# Altium PCB Main.PcbDoc (part 2 of 2)
Units mil, origin at the board's own origin, x right, y up, seen from the top; angles counter-clockwise.
Board outline 5500 x 5000 mil, 4 copper layers (Top Layer, Gnd 1, Interconnects, Gnd 2), stack 65.2 mil thick; 168 components, 137 nets, 565 pads, 1221 vias.
Unrouted connection lines stored in the file: 808.
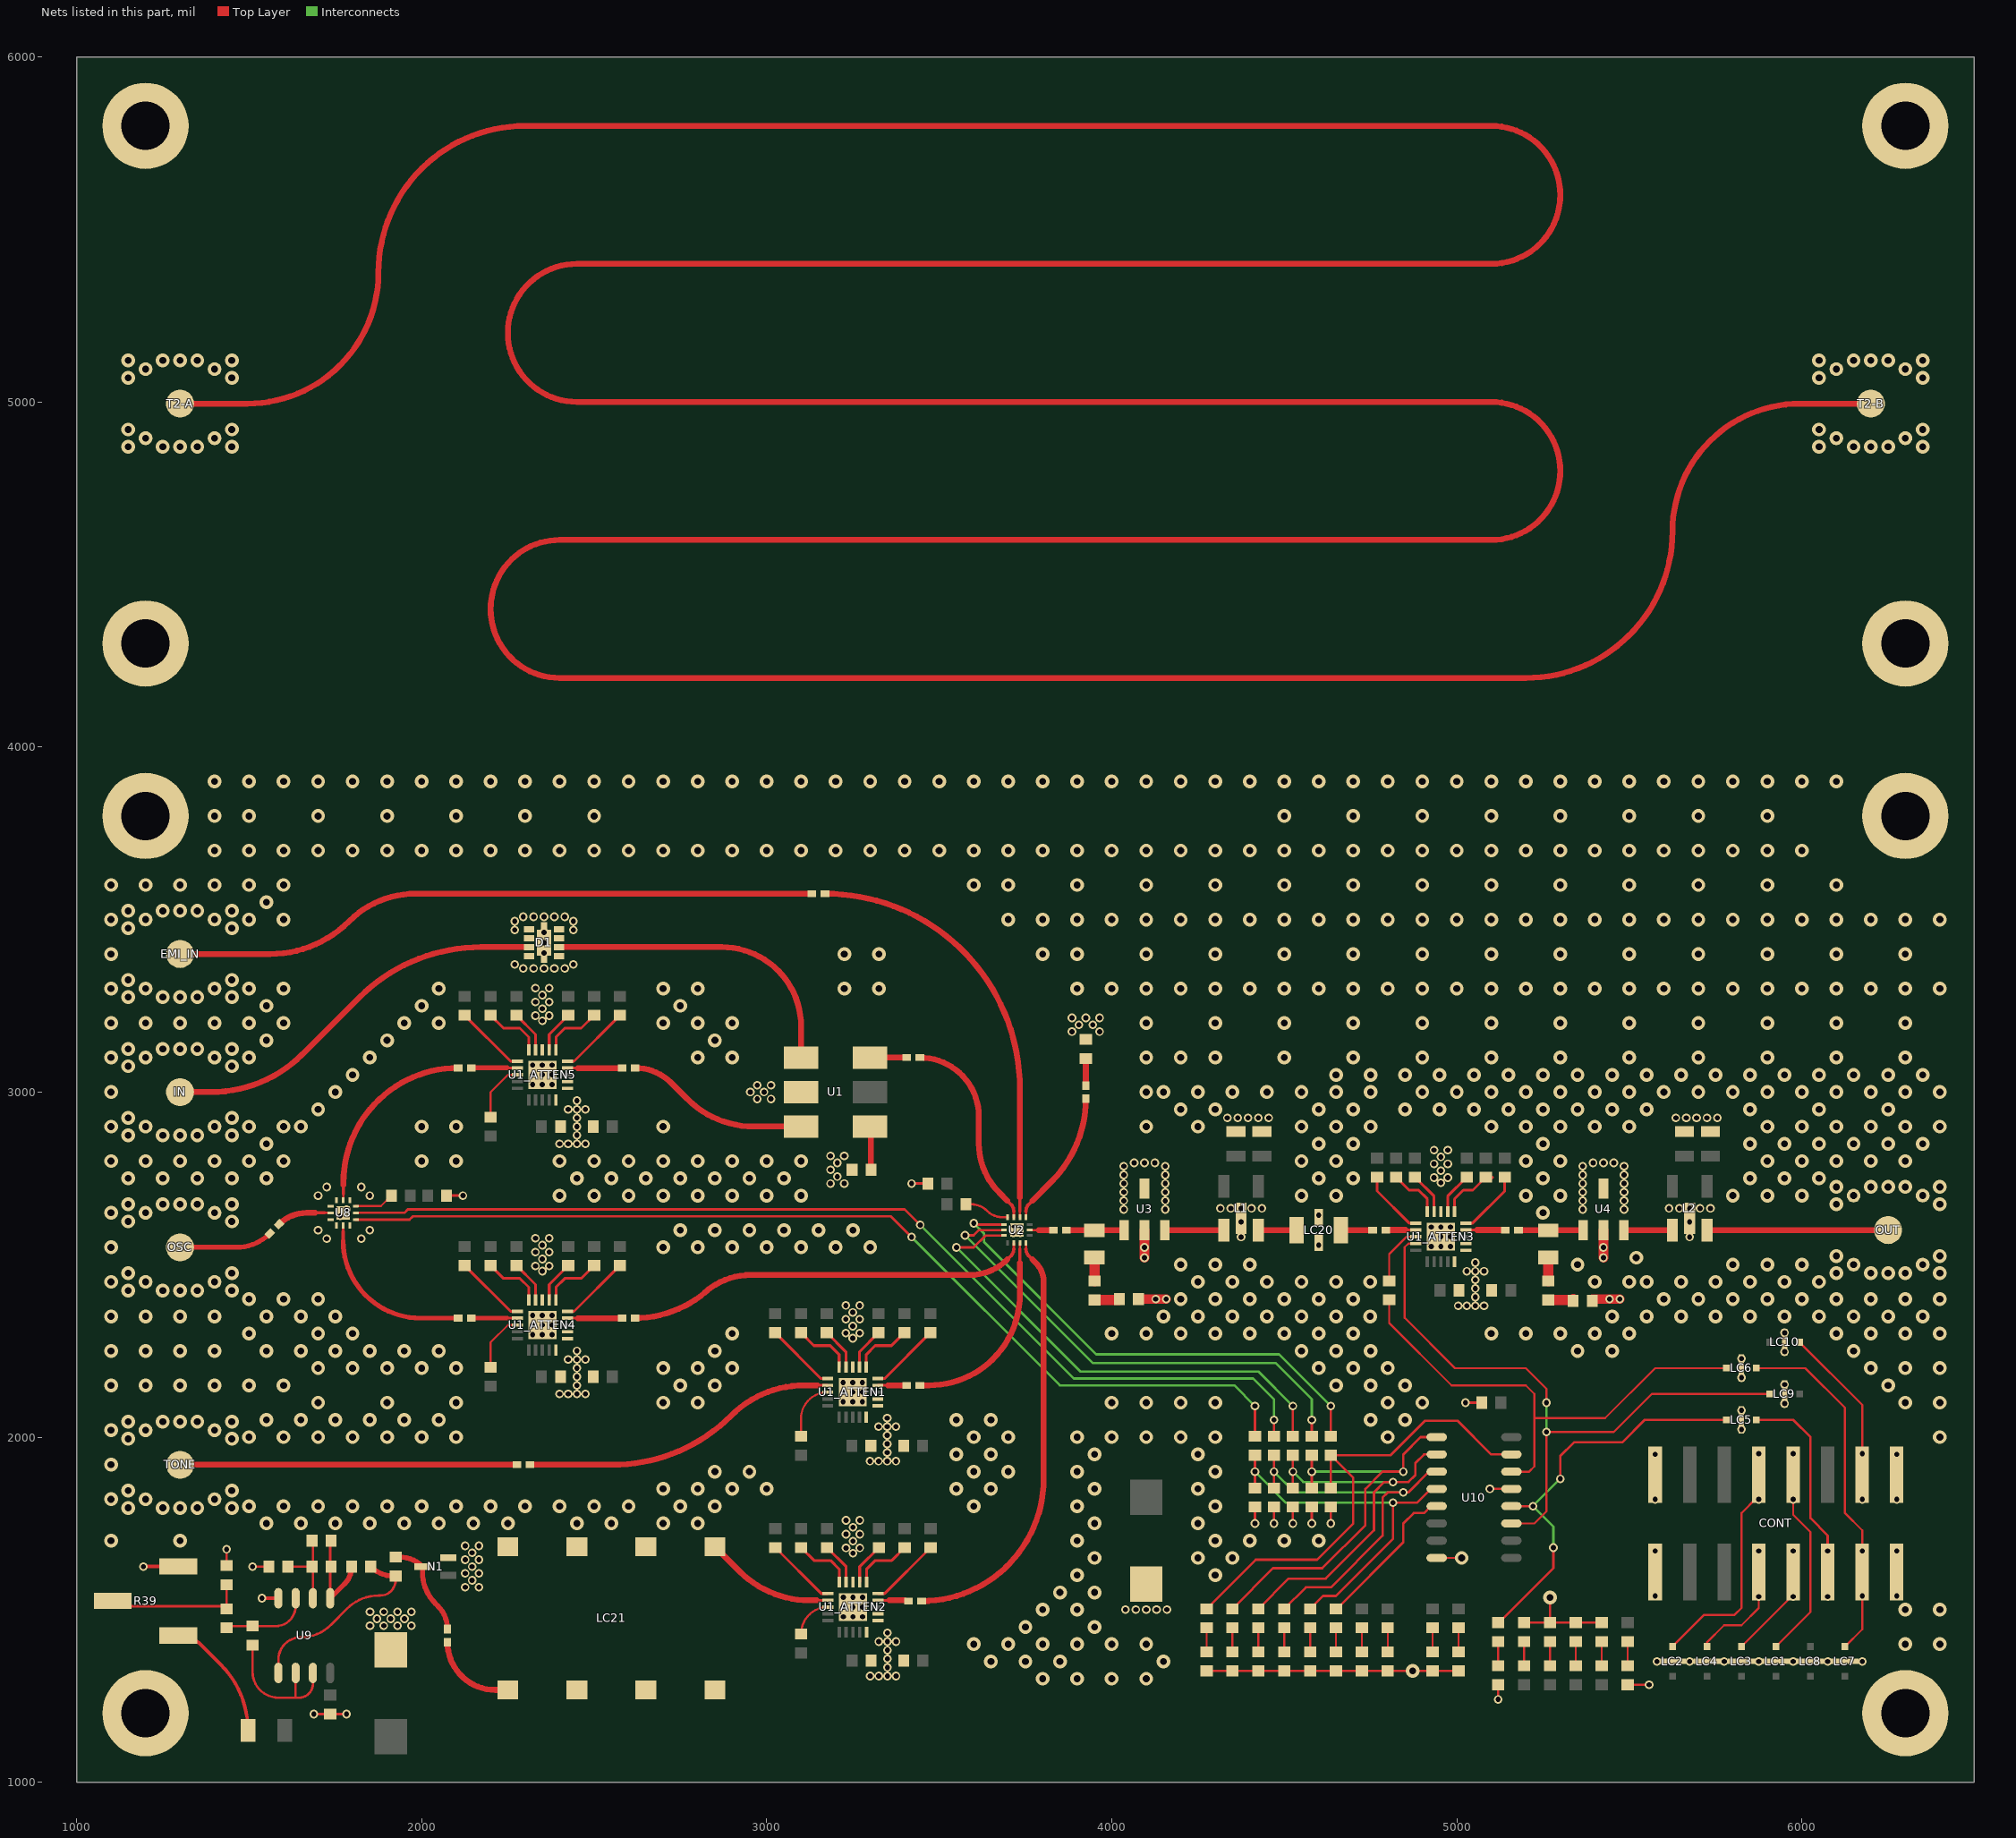
[diagram p3: the nets of this part, all layers, seen from the top]

## Via types
v1: diameter 40, hole 20, Top Layer to Gnd 2, tented both sides, 786 vias
v2: diameter 25, hole 15, Top Layer to Gnd 2, tented both sides, 384 vias
v3: diameter 25, hole 15, Top Layer to Gnd 2, 45 vias
v4: diameter 20, hole 10, Top Layer to Gnd 2, tented bottom, 4 vias
v5: diameter 45, hole 25, Top Layer to Gnd 2, tented both sides, 2 vias

## Nets (pads, with @x,y where several pads share a name; then routed paths per layer and width w, separated by ;. In a path a pad name is that pad's centre, name@x,y a point inside that pad or via, vN(x,y) a via of type N, cw(c..) or ccw(c..) an arc to the next point about the centre after c; other vN are vias at no path point) (continued)
GND: C4_ATTEN1.1 C4_ATTEN2.1 C4_ATTEN3.1 C4_ATTEN4.1 C4_ATTEN5.1 C6_ATTEN1.1 C6_ATTEN2.1 C6_ATTEN3.1 C6_ATTEN4.1 C6_ATTEN5.1 C9.1 C10.1 C12.1 C13.1 C18.1 C20.1 C21.1 C22.1 C23.1 C24.1 C25.1 C30.1 C32.1 C34.1 C40.2 C41.2 C60.2 C61.2 CONT.1 CONT.2 CONT.15 CONT.16 D1.1 D1.3 D1.4 D1.5 D1.6 D1.8 D1.9 D1.10 DP1.2 DP2.2 DP3.2 DP4.2 DP5.2 DP6.2 DP7.2 DP8.2 DP9.2 DP10.2 DP11.2 DP12.2 DP13.2 DP14.2 DP15.2 DP16.2 EMI_IN.2 EMI_IN.3 EMI_IN.4 EMI_IN.5 IN.2 IN.3 IN.4 IN.5 L1.5 L2.5 LC1.2 LC2.2 LC3.2 LC4.2 LC5.2 LC6.2 LC7.2 LC8.2 LC9.2 LC10.2 LC20.2 LC20.4 LC21.2 LC21.3 LC21.4 LC21.5 LC21.6 LC21.7 N1.2 OSC.2 OSC.3 OSC.4 OSC.5 OUT.2 OUT.3 OUT.4 OUT.5 pad.0 pad.1 R1.1 R2.1 R37.1 R39.3 T2-A.2 T2-A.3 T2-A.4 T2-A.5 T2-B.2 T2-B.3 T2-B.4 T2-B.5 TONE.2 TONE.3 TONE.4 TONE.5 U1.2 U1_ATTEN1.10 U1_ATTEN1.11 U1_ATTEN1.12 U1_ATTEN1.18 U1_ATTEN1.21 U1_ATTEN2.10 U1_ATTEN2.11 U1_ATTEN2.12 U1_ATTEN2.18 U1_ATTEN2.21 U1_ATTEN3.10 U1_ATTEN3.11 U1_ATTEN3.12 U1_ATTEN3.18 U1_ATTEN3.21 U1_ATTEN4.10 U1_ATTEN4.11 U1_ATTEN4.12 U1_ATTEN4.18 U1_ATTEN4.21 U1_ATTEN5.10 U1_ATTEN5.11 U1_ATTEN5.12 U1_ATTEN5.18 U1_ATTEN5.21 U2.15 U3.2 U3.4 U4.2 U4.4 U8.1 U8.3 U8.4 U8.6 U8.10 U8.12 U8.13 U9.4 U10.8 U10.13 | length 2895.3
  Top Layer w6: DP1.2@4275,1322.44 DP2.2@4350,1322.44 DP3.2@4425,1322.44 DP4.2@4500,1322.44 DP6.2@4650,1322.44 DP7.2@4725,1322.44 DP8.2@4800,1322.44 v1(4872.44,1322.44) DP10.2@4999.88,1322.44 ; U10.8@4941.73,1650 v1(5014.17,1650) ; DP14.2@5195,1462.56 DP13.2@5270,1462.56 ; v1(5270,1535) DP13.2@5270,1462.56 ; DP15.2@5420,1462.56 DP12.2@5345,1462.56 DP13.2@5270,1462.56 ; v2(5580,1350) LC2.2@5625,1350 LC4.2@5725,1350 LC3.2@5825,1350 LC1.2@5925,1350 LC8.2@6025,1350 LC7.2@6125,1350 v2(6175,1350)
  Top Layer w7: C32.1@1435,1627.56 v2(1435,1675) ; v2(1510,1625) R37.1@1557.44,1625 ; v2(1687.56,1197.44) C34.1@1735,1197.44 v2(1782.44,1197.44) ; C30.1@2072.56,2700 v2(2120,2700) ; v2(3420,2735) C20.1@3467.44,2735 ; v2(4415,1750) C24.1@4415,1797.44 ; v2(4470,1750) C25.1@4470,1797.44 ; v2(4525,1750) C23.1@4525,1797.44 ; v2(4580,1750) C22.1@4580,1797.44 ; v2(4635,1750) C21.1@4635,1797.44 ; v2(5025,2100) C18.1@5072.44,2100 ; v2(5095.83,1850) U10.13@5158.27,1850 ; v2(5120,1240) DP11.2@5120,1282.44 ; DP16.2@5495,1282.44 v2(5557.44,1282.44)
  Top Layer w10: v2(1193.56,1625) R39.3@1295,1625 ; v2(1537.56,1533.27) U9.4@1585,1533.27
  Top Layer w28: C60.2@4077.56,2400 v2(4157.56,2400) ; v2(4095,2520) U3.2@4095,2600 ; C61.2@5392.56,2400 v2(5472.56,2400) ; v2(5425,2520) U4.2@5425,2600
  other v1: 3800,1300 3900,1300 4000,1300 4100,1300 3650,1350 3750,1350 3850,1350 4150,1350 3600,1400 3700,1400 3800,1400 3900,1400 4000,1400 4100,1400 6300,1400 6400,1400 3750,1450 3950,1450 3800,1500 3900,1500 6300,1500 6400,1500 3850,1550 3950,1550 3900,1600 4300,1600 3950,1650 4250,1650 4350,1650 1100,1700 1300,1700 3900,1700 4300,1700 4400,1700 4500,1700 4600,1700 1550,1750 1650,1750 1750,1750 1850,1750 1950,1750 2050,1750 2150,1750 2250,1750 2450,1750 2550,1750 2700,1750 2800,1750 3950,1750 4250,1750 1150,1795 1250,1795 1300,1795 1350,1795 1450,1795 1500,1800 1600,1800 1700,1800 1800,1800 1900,1800 2000,1800 2100,1800 2200,1800 2300,1800 2400,1800 2500,1800 2600,1800 2750,1800 2850,1800 3600,1800 3900,1800 4300,1800 1100,1820 1150,1845 1450,1845 2700,1850 2800,1850 2900,1850 3000,1850 3550,1850 3650,1850 3950,1850 4250,1850 2850,1900 2950,1900 3600,1900 3700,1900 3900,1900 4300,1900 1100,1920 3550,1950 3650,1950 3950,1950 4250,1950 1150,1995 1450,1995 1500,2000 1600,2000 1700,2000 1800,2000 1900,2000 2000,2000 2100,2000 3600,2000 3700,2000 3900,2000 4000,2000 4100,2000 4200,2000 4300,2000 4800,2000 6400,2000 1100,2020 1150,2045 1250,2045 1300,2045 1350,2045 1450,2045 1550,2050 1650,2050 1750,2050 1850,2050 1950,2050 2050,2050 3550,2050 3650,2050 4750,2050 4850,2050 1700,2100 1900,2100 2100,2100 2700,2100 2800,2100 4000,2100 4100,2100 4200,2100 4300,2100 4800,2100 4900,2100 6300,2100 6400,2100 1100,2150 1200,2150 1300,2150 1400,2150 1500,2150 1600,2150 2750,2150 2850,2150 4650,2150 4750,2150 4850,2150 6250,2150 1700,2200 1800,2200 1900,2200 2000,2200 2100,2200 2700,2200 2800,2200 2900,2200 4600,2200 4700,2200 4800,2200 6200,2200 6300,2200 6400,2200 1100,2250 1200,2250 1300,2250 1400,2250 1550,2250 1650,2250 1750,2250 1850,2250 1950,2250 2050,2250 2850,2250 4550,2250 4650,2250 4750,2250 5350,2250 5450,2250 6150,2250 1500,2300 1700,2300 1800,2300 2900,2300 4000,2300 4100,2300 4200,2300 4300,2300 4400,2300 4500,2300 4600,2300 4700,2300 5100,2300 5200,2300 5300,2300 5400,2300 5500,2300 6100,2300 6200,2300 6300,2300 6400,2300 1100,2350 1200,2350 1300,2350 1400,2350 1550,2350 1650,2350 1750,2350 4150,2350 4250,2350 4350,2350 4450,2350 4550,2350 4650,2350 4749.02,2350 5450,2350 5550,2350 5650,2350 5750,2350 5850,2350 5950,2350 6050,2350 6150,2350 6250,2350 6350,2350 1500,2400 1600,2400 1700,2400 4200,2400 4300,2400 4400,2400 4500,2400 4600,2400 4700,2400 5600,2400 5700,2400 5800,2400 5900,2400 6000,2400 6100,2400 6200,2400 6300,2400 6400,2400 1150,2425 1250,2425 1300,2425 1350,2425 1450,2425 1100,2450 4250,2450 4350,2450 4450,2450 4550,2450 4650,2450 4749.02,2450 5400,2450 5500,2450 5550,2450 5650,2450 5750,2450 5850,2450 5950,2450 6050,2450 1150,2475 1450,2475 6100,2475 6200,2475 6250,2475 6300,2475 6400,2475 4200,2500 4300,2500 4400,2500 5350,2500 5800,2500 5900,2500 6000,2500 5520,2520 6100,2525 6400,2525 1100,2550 2700,2550 2800,2550 2900,2550 3000,2550 3100,2550 3200,2550 3300,2550 2750,2600 2850,2600 2950,2600 3050,2600 3150,2600 3250,2600 1150,2625 1450,2625 1100,2650 5250,2650 1150,2675 1250,2675 1300,2675 1350,2675 1450,2675 6100,2675 6400,2675 2400,2700 2500,2700 2600,2700 2700,2700 2800,2700 2900,2700 3000,2700 3100,2700 4550,2700 4650,2700 5200,2700 5300,2700 5800,2700 5900,2700 6000,2700 6100,2725 6200,2725 6250,2725 6300,2725 6400,2725 1150,2750 1250,2750 1350,2750 1450,2750 1550,2750 2450,2750 2550,2750 2650,2750 2750,2750 2850,2750 2950,2750 3050,2750 4600,2750 4700,2750 5250,2750 5850,2750 5950,2750 6050,2750 1100,2800 1200,2800 1300,2800 1400,2800 1500,2800 1600,2800 2000,2800 2100,2800 2400,2800 2500,2800 2600,2800 2700,2800 2800,2800 2900,2800 3000,2800 3100,2800 4550,2800 4650,2800 5200,2800 5300,2800 5900,2800 6000,2800 6100,2800 6200,2800 6300,2800 1550,2850 4600,2850 4700,2850 5250,2850 5850,2850 5950,2850 6050,2850 6150,2850 6250,2850 6350,2850 1150,2875 1250,2875 1300,2875 1350,2875 1450,2875 1100,2900 1500,2900 1600,2900 1650,2900 2000,2900 2100,2900 2700,2900 4100,2900 4250,2900 4550,2900 4650,2900 4750,2900 5100,2900 5200,2900 5300,2900 5400,2900 5500,2900 5900,2900 6000,2900 6100,2900 6200,2900 6300,2900 6400,2900 1150,2925 1450,2925 1700,2950 4200,2950 4300,2950 4600,2950 4700,2950 4850,2950 4950,2950 5050,2950 5150,2950 5250,2950 5350,2950 5450,2950 5550,2950 5850,2950 6050,2950 6250,2950 1100,3000 1750,3000 4100,3000 4150,3000 4250,3000 4350,3000 4450,3000 4550,3000 4650,3000 4750,3000 4900,3000 5000,3000 5100,3000 5200,3000 5300,3000 5400,3000 5500,3000 5600,3000 5700,3000 5800,3000 5900,3000 6000,3000 6100,3000 6200,3000 6300,3000 6400,3000 1800,3050 4650,3050 4750,3050 4850,3050 4950,3050 5050,3050 5150,3050 5250,3050 5350,3050 5450,3050 5550,3050 5650,3050 5750,3050 5850,3050 5950,3050 6050,3050 6150,3050 6250,3050 6350,3050 1150,3075 1450,3075 1100,3100 1500,3100 1850,3100 2800,3100 2900,3100 4100,3100 4200,3100 4300,3100 4500,3100 4700,3100 4900,3100 5100,3100 5300,3100 5500,3100 5700,3100 5900,3100 6100,3100 6300,3100 1150,3125 1250,3125 1300,3125 1350,3125 1450,3125 1550,3150 1900,3150 2850,3150 1100,3200 1200,3200 1300,3200 1400,3200 1500,3200 1600,3200 1950,3200 2050,3200 2700,3200 2800,3200 2900,3200 4100,3200 4300,3200 4500,3200 4700,3200 4900,3200 5100,3200 5300,3200 5500,3200 5700,3200 5900,3200 6100,3200 6300,3200 1550,3250 2000,3250 2750,3250 1150,3275 1250,3275 1300,3275 1350,3275 1450,3275 1100,3300 1500,3300 1600,3300 2050,3300 2700,3300 2800,3300 3225,3300 3325,3300 3900,3300 4000,3300 4100,3300 4200,3300 4300,3300 4400,3300 4500,3300 4600,3300 4700,3300 4800,3300 4900,3300 5000,3300 5100,3300 5200,3300 5300,3300 5400,3300 5500,3300 5600,3300 5700,3300 5800,3300 5900,3300 6000,3300 6100,3300 6200,3300 6300,3300 6400,3300 1150,3325 1450,3325 1100,3400 3225,3400 3325,3400 3800,3400 3900,3400 4100,3400 4300,3400 4500,3400 4700,3400 4900,3400 5100,3400 5300,3400 5500,3400 5700,3400 5900,3400 6100,3400 6300,3400 1150,3475 1450,3475 1100,3500 1500,3500 1600,3500 3700,3500 3800,3500 3900,3500 4000,3500 4100,3500 4200,3500 4300,3500 4400,3500 4500,3500 4600,3500 4700,3500 4800,3500 4900,3500 5000,3500 5100,3500 5200,3500 5300,3500 5400,3500 5500,3500 5600,3500 5700,3500 5800,3500 5900,3500 6000,3500 6100,3500 6200,3500 6300,3500 6400,3500 1150,3525 1250,3525 1300,3525 1350,3525 1450,3525 1550,3550 1100,3600 1200,3600 1300,3600 1400,3600 1500,3600 1600,3600 3600,3600 3700,3600 3900,3600 4100,3600 4300,3600 4500,3600 4700,3600 4900,3600 5100,3600 5300,3600 5500,3600 5700,3600 5900,3600 6100,3600 1400,3700 1500,3700 1600,3700 1700,3700 1800,3700 1900,3700 2000,3700 2100,3700 2200,3700 2300,3700 2400,3700 2500,3700 2600,3700 2700,3700 2800,3700 2900,3700 3000,3700 3100,3700 3200,3700 3300,3700 3400,3700 3500,3700 3600,3700 3700,3700 3800,3700 3900,3700 4000,3700 4100,3700 4200,3700 4300,3700 4400,3700 4500,3700 4600,3700 4700,3700 4800,3700 4900,3700 5000,3700 5100,3700 5200,3700 5300,3700 5400,3700 5500,3700 5600,3700 5700,3700 5800,3700 5900,3700 6000,3700 1400,3800 1500,3800 1700,3800 1900,3800 2100,3800 2300,3800 2500,3800 4500,3800 4700,3800 4900,3800 5100,3800 5300,3800 5500,3800 5700,3800 5900,3800 1400,3900 1500,3900 1600,3900 1700,3900 1800,3900 1900,3900 2000,3900 2100,3900 2200,3900 2300,3900 2400,3900 2500,3900 2600,3900 2700,3900 2800,3900 2900,3900 3000,3900 3100,3900 3200,3900 3300,3900 3400,3900 3500,3900 3600,3900 3700,3900 3800,3900 3900,3900 4000,3900 4100,3900 4200,3900 4300,3900 4400,3900 4500,3900 4600,3900 4700,3900 4800,3900 4900,3900 5000,3900 5100,3900 5200,3900 5300,3900 5400,3900 5500,3900 5600,3900 5700,3900 5800,3900 5900,3900 6000,3900 6100,3900 1150,4870 1250,4870 1300,4870 1350,4870 1450,4870 6050,4870 6150,4870 6200,4870 6250,4870 6350,4870 1150,4920 1450,4920 6050,4920 6350,4920 1150,5070 1450,5070 6050,5070 6350,5070 1150,5120 1250,5120 1300,5120 1350,5120 1450,5120 6050,5120 6150,5120 6200,5120 6250,5120 6350,5120
  other v2: 3300,1307.56 3325,1307.56 3350,1307.56 3375,1307.56 3350,1332.56 5675,1350 5775,1350 5875,1350 5975,1350 6075,1350 3350,1357.56 3350,1382.56 3325,1407.56 3350,1407.56 3375,1407.56 3350,1432.56 1850.44,1453.79 1890.44,1453.79 1930.44,1453.79 1970.44,1453.79 1870.44,1473.79 1910.44,1473.79 1950.44,1473.79 1850.44,1493.79 1890.44,1493.79 1930.44,1493.79 1970.44,1493.79 4040,1500.12 4070,1500.12 4100,1500.12 4130,1500.12 4160,1500.12 5575,1540 6275,1540 2126.34,1565 2166.34,1565 2146.34,1585 2126.34,1605 2166.34,1605 2146.34,1625 2126.34,1645 2166.34,1645 3250,1663.86 2146.34,1665 5575,1670 6275,1670 3230,1678.86 3270,1678.86 2126.34,1685 2166.34,1685 3250,1698.86 3230,1718.86 3270,1718.86 3250,1738.86 3230,1758.86 3270,1758.86 5575,1820 6275,1820 3299.43,1930.33 3324.43,1930.33 3349.43,1930.33 3374.43,1930.33 5575,1950 6275,1950 3349.43,1955.33 3349.43,1980.33 3349.43,2005.33 5825,2022.44 3324.43,2030.33 3349.43,2030.33 3374.43,2030.33 3349.43,2055.33 5825,2077.56 5950,2097.44 2400,2125 2425,2125 2450,2125 2475,2125 2450,2150 5950,2152.56 5825,2172.44 2450,2175 2450,2200 2425,2225 2450,2225 2475,2225 5825,2227.56 5950,2247.44 2450,2250 3249.43,2286.63 3229.43,2301.63 3269.43,2301.63 5950,2302.56 3249.43,2321.63 3229.43,2341.63 3269.43,2341.63 3249.43,2361.63 5004,2380.77 5029,2380.77 5054,2380.77 5079,2380.77 3229.43,2381.63 3269.43,2381.63 4127.56,2400 5442.56,2400 5054,2405.77 5054,2430.77 5054,2455.77 2350,2481.3 5029,2480.77 5054,2480.77 5079,2480.77 2330,2496.3 2370,2496.3 5054,2505.77 2350,2516.3 2330,2536.3 2370,2536.3 4095,2550 5425,2550 2350,2556.3 4600,2556.5 1725,2575 1825,2575 2330,2576.3 2370,2576.3 4375,2580 5675,2580 1700,2600 1850,2600 4375,2624 5675,2624 1764,2641 4600,2643.5 1782,2659 4035,2660 4155,2660 5365,2660 5485,2660 4315,2663 4345,2663 4375,2663 4405,2663 4435,2663 5615,2663 5645,2663 5675,2663 5705,2663 5735,2663 4035,2685 4155,2685 5365,2685 5485,2685 1700,2700 1850,2700 4035,2710 4155,2710 5365,2710 5485,2710 1725,2725 1825,2725 3185,2735 3225,2735 4035,2735 4155,2735 5365,2735 5485,2735 4954,2737.07 4934,2752.07 4974,2752.07 3205,2755 4035,2760 4155,2760 5365,2760 5485,2760 4954,2772.07 3185,2775 4035,2785 4155,2785 5365,2785 5485,2785 4934,2792.07 4974,2792.07 3205,2795 4065.02,2795 4095.02,2795 4125.02,2795 5395.02,2795 5425.02,2795 5455.02,2795 4954,2812.07 3185,2815 3225,2815 4934,2832.07 4974,2832.07 2400,2850 2425,2850 2450,2850 2475,2850 2450,2875 2450,2900 2450,2925 4335,2925 4365,2925 4395,2925 4425,2925 4455,2925 5635,2925 5665,2925 5695,2925 5725,2925 5755,2925 2425,2950 2450,2950 2475,2950 2450,2975 2972.56,2980 3012.56,2980 2952.56,3000 2992.56,3000 2972.56,3020 3012.56,3020 3885,3175 3965,3175 3905,3195 3945,3195 2350,3206.3 3885,3215 3925,3215 3965,3215 2330,3221.3 2370,3221.3 2350,3241.3 2330,3261.3 2370,3261.3 2350,3281.3 2330,3301.3 2370,3301.3 2294.71,3357.99 2324.71,3357.99 2354.71,3357.99 2384.71,3357.99 2414.71,3357.99 2269.71,3369.99 2439.71,3369.99 2354.71,3402.99 2354.71,3432.99 2354.71,3462.99 2269.71,3469.99 2439.71,3469.99 2269.71,3494.99 2439.71,3494.99 2294.71,3507.99 2324.71,3507.99 2354.71,3507.99 2384.71,3507.99 2414.71,3507.99
  other v3: 3222,1479.56 3250,1479.56 3278,1479.56 3222,1507.56 3250,1507.56 3278,1507.56 3222,1535.56 3250,1535.56 3278,1535.56 3221.43,2102.33 3249.43,2102.33 3277.43,2102.33 3221.43,2130.33 3249.43,2130.33 3277.43,2130.33 3221.43,2158.33 3249.43,2158.33 3277.43,2158.33 2322,2297 2350,2297 2378,2297 2322,2325 2350,2325 2378,2325 2322,2353 2350,2353 2378,2353 4926,2552.77 4954,2552.77 4982,2552.77 4926,2580.77 4954,2580.77 4982,2580.77 4926,2608.77 4954,2608.77 4982,2608.77 2322,3022 2350,3022 2378,3022 2322,3050 2350,3050 2378,3050 2322,3078 2350,3078 2378,3078
  other v4: 3715,2590 3735,2590 3715,2610 3735,2610
LV_CS_1: CONT.8 LC2.3 | length 584.9
  Top Layer w6: LC2.3@5625,1393.31 5716.69,1485 5805,1485 5825,1505 5825,1780 CONT.8@5870,1825
  other v2: 5875,1820 5875,1952
LV_CS_2: CONT.7 LC4.3 | length 224.4
  Top Layer w6: 5725,1405.12 5774.88,1455 5825,1455 5875,1505 v2(5875,1538)
  other v2: 5875,1670
LV_CS_3: CONT.10 LC1.3 | length 559.8
  Top Layer w6: LC1.3@5925,1393.31 6025,1493.31 6025,1725 5975,1775 CONT.10@5975,1891
  other v2: 5975,1820 5975,1952
LV_CS_4: CONT.9 LC3.3 | length 212.1
  Top Layer w6: LC3.3@5825,1393.31 CONT.9@5975,1543.31
  other v2: 5975,1538 5975,1670
LV_CS_5: CONT.14 LC10.3 | length 464.3
  Top Layer w6: LC10.3@5993.31,2275 6175,2093.31 v2(6175,1952) CONT.14@6175,1891 CONT.14@6175,1886
  other v2: 6175,1820
MOSI: CONT.13 LC6.3 LC7.3 | length 973.4
  Top Layer w6: LC6.3@5868.31,2200 6010,2200 6125,2085 6125,1780 6175,1730 CONT.13@6175,1604 ; LC7.3@6125,1393.31 6175,1443.31 v2(6175,1540)
  other v2: 6175,1670
NetC1_1: C1.1 TONE.1 | length 976
  Top Layer w17: TONE.1@1300,1920 2103.49,1920 C1.1@2275.98,1920
NetC1_2: C1.2 U1_ATTEN1.2 | length 924.3
  Top Layer w8: 3147.06,2150.02 U1_ATTEN1.2@3176.79,2150.02
  Top Layer w17: C1.2@2314.02,1920 2553.22,1920 ccw(c2553.22,2407.13) 2744.67,1959.2 ccw(c2553.22,2407.13) 2897.68,2062.68 cw(c3108.53,1851.83) 2987.44,2124.32 cw(c3108.53,1851.83) 3108.53,2150.02 3147.06,2150.02
NetC2_1: C2.1 U1_ATTEN1.14 | length 74.7
  Top Layer w8: U1_ATTEN1.14@3322.06,2150.02 3351.79,2150.02
  Top Layer w17: 3351.79,2150.02 C2.1@3396.8,2150.02
NetC2_2: C2.2 U2.10 | length 589.3
  Top Layer w7: 3733.86,2545 U2.10@3733.86,2562.6
  Top Layer w10: 3733.86,2505 3733.86,2545
  Top Layer w17: C2.2@3444.02,2150 3470.28,2150 ccw(c3470.28,2413.58) 3733.86,2413.58 3733.86,2505
NetC3_1: C3.1 U1.6 | length 100
  Top Layer w17: U1.6@3300,3100 C3.1@3400,3100
NetC3_2: C3.2 U2.3 | length 592.3
  Top Layer w7: U2.3@3716.14,2637.4 3716.14,2655
  Top Layer w10: 3697.72,2685 3707.96,2674.76 cw(c3688.2,2655) 3716.14,2655
  Top Layer w17: C3.2@3444.02,3100 cw(c3444.02,2929.02) 3615,2929.02 3615,2850 ccw(c3813.65,2850) 3673.18,2709.53 3697.72,2685
NetC4_1: C4.1 R2.2 | length 78.4
  Top Layer w17: C4.1@3925,3019.02 R2.2@3925,3097.44
NetC4_2: C4.2 U2.1 | length 399.6
  Top Layer w7: U2.1@3751.57,2637.4 3751.57,2655
  Top Layer w10: 3751.57,2655 cw(c3779.52,2655) 3759.76,2674.76 3770,2685
  Top Layer w17: 3770,2685 3825.31,2740.31 ccw(c3584.63,2980.98) C4.2@3925,2980.98
NetC5_1: C5.1 N1.3 R3.1 | length 286.4
  Top Layer w15: R3.1@1925,1652.56 1936.07,1652.56 cw(c1936.07,1558.47) N1.3@2002.6,1625 2002.6,1608.3 ccw(c2130.3,1608.3) 2040,1518 2047.43,1510.57 cw(c1980.88,1444.02) C5.1@2075,1444.02
NetC5_2: C5.2 LC21.1 | length 254
  Top Layer w17: C5.2@2075,1405.98 ccw(c2213.48,1405.98) 2213.48,1267.5 LC21.1@2250,1267.5
NetC6_1: C6.1 U1_ATTEN2.14 | length 74.7
  Top Layer w8: U1_ATTEN2.14@3322.64,1527.24 3352.36,1527.24
  Top Layer w17: 3354.98,1527.24 C6.1@3400,1527.24
NetC6_2: C6.2 U2.11 | length 1256.1
  Top Layer w7: 3751.57,2545 U2.11@3751.57,2562.6
  Top Layer w10: 3751.57,2545 ccw(c3779.52,2545) 3759.76,2525.24 3770,2515
  Top Layer w17: C6.2@3449.02,1525 ccw(c3449.02,1878.7) 3802.72,1878.7 3802.72,2450 ccw(c3724.78,2450) 3779.89,2505.11 3770,2515
NetC7_1: C7.1 EMI_IN.1 | length 1877.8
  Top Layer w17: EMI_IN.1@1300,3400 1560.65,3400 ccw(c1560.65,3724.35) 1790,3495 cw(c1983.14,3301.86) 1983.14,3575 C7.1@3130.98,3575
NetC7_2: C7.2 U2.2 | length 1260
  Top Layer w7: U2.2@3733.86,2637.4 3733.86,2655
  Top Layer w10: 3733.86,2655 3733.86,2695
  Top Layer w17: C7.2@3169.02,3575 cw(c3169.02,3010.16) 3733.86,3010.16 3733.86,2695
NetC8_1: C8.1 U2.13 | length 68.6
  Top Layer w7: U2.13@3762.4,2600 3787.99,2600
  Top Layer w17: 3787.99,2600 C8.1@3830.98,2600
NetC8_2: C8.2 L3.1 U3.1 | length 171
  Top Layer w17: C8.2@3869.02,2600 U3.1@4040,2600
NetC14_1: C14.1 U1_ATTEN3.14 | length 110.7
  Top Layer w8: U1_ATTEN3.14@5026.64,2600.46 5056.36,2600.46
  Top Layer w17: 5058.98,2600.46 C14.1@5140,2600.46
NetC14_2: C14.2 L4.1 U4.1 | length 187
  Top Layer w17: C14.2@5179.02,2600 5293.03,2600.01 U4.1@5366,2600
NetC15_1: C15.1 U8.11 | length 572.4
  Top Layer w7: U8.11@1773.43,2687.4 1773.43,2705
  Top Layer w10: 1773.43,2705 1773.43,2731.06
  Top Layer w17: 1773.43,2731.06 1773.43,2737.44 cw(c2105.98,2737.44) C15.1@2105.98,3070
NetC15_2: C15.2 U1_ATTEN5.2 | length 133.7
  Top Layer w8: 2247.64,3069.68 U1_ATTEN5.2@2277.36,3069.68
  Top Layer w13.96: C15.2@2144.02,3069.68 C15.2@2144.02,3070 2247.64,3070
NetC16_1: C16.1 U1_ATTEN5.14 | length 158
  Top Layer w8: U1_ATTEN5.14@2422.64,3069.68 2452.36,3069.68
  Top Layer w17: 2452.36,3069.68 C16.1@2580.67,3069.68
NetC16_2: C16.2 U1.3 | length 533.3
  Top Layer w17: C16.2@2619.02,3070 cw(c2619.02,2922.77) 2723.12,3026.88 2770,2980 ccw(c2963.14,3173.14) 2963.14,2900 U1.3@3100,2900
NetC17_1: C17.1 U8.5 | length 504.9
  Top Layer w7: 1772.57,2595 U8.5@1772.57,2612.6
  Top Layer w10: 1772.57,2568.94 1772.57,2595
  Top Layer w13.96: 1772.57,2568.93 ccw(c1996.52,2568.94) 1996.52,2345 C17.1@2105.98,2345
NetC17_2: C17.2 U1_ATTEN4.2 | length 133.3
  Top Layer w8: 2247.64,2344.68 U1_ATTEN4.2@2277.36,2344.68
  Top Layer w13.96: C17.2@2144.02,2345 2247.64,2345
NetC19_1: C19.1 U1_ATTEN4.14 | length 158.5
  Top Layer w8: U1_ATTEN4.14@2422.64,2344.68 2452.36,2344.68
  Top Layer w17: 2452.36,2344.68 2580.67,2344.68 C19.1@2580.98,2345
NetC19_2: C19.2 U2.9 | length 1178.4
  Top Layer w7: 3716.14,2545 U2.9@3716.14,2562.6
  Top Layer w10: 3697.72,2515 3707.96,2525.24 ccw(c3688.2,2545) 3716.14,2545
  Top Layer w17: C19.2@2615.65,2345 ccw(c2615.65,2669.35) 2810.94,2410.38 cw(c2954.87,2266.45) 2837.56,2432.8 cw(c2954.87,2266.45) 2954.87,2470 3589.19,2470 ccw(c3589.19,2623.37) 3697.64,2514.92 ccw(c3613.22,2599.5) 3697.72,2515
NetC27_1: C27.1 OSC.1 | length 270.5
  Top Layer w13.96: OSC.1@1300,2550 1463.67,2550 ccw(c1463.67,2685.99) C27.1@1559.83,2589.83
NetC27_2: C27.2 U8.2 | length 158.2
  Top Layer w7: 1718,2650.43 U8.2@1735.6,2650.43
  Top Layer w10: 1691.94,2650.43 1718,2650.43
  Top Layer w17: C27.2@1586.72,2616.72 cw(c1667.06,2536.39) 1667.06,2650 1691.94,2650 1691.94,2650.43
NetC28_1: C28.1 LC20.3 | length 92
  Top Layer w17: LC20.3@4664,2600 C28.1@4755.98,2600
NetC28_2: C28.2 U1_ATTEN3.2 | length 86.4
  Top Layer w8: 4851.64,2600.46 U1_ATTEN3.2@4881.36,2600.46
  Top Layer w17: C28.2@4795,2600.46 4851.64,2600.46
NetC31_1: C31.1 R32.1 R37.2 U9.2 | length 240.2
  Top Layer w7: R37.2@1612.56,1625 C31.1@1682.44,1625 C31.1@1685,1625 ; R32.1@1682.44,1700 1685,1697.44 C31.1@1685,1625 ; U9.2@1685,1533.27 C31.1@1685,1625
NetC31_2: C31.2 R32.2 R36.2 U9.1 | length 282.3
  Top Layer w7: U9.1@1735,1533.27 1735,1697.44 R32.2@1737.56,1700
  Top Layer w15: U9.1@1735,1533.27 1776.73,1575 ccw(c1726.73,1625) R36.2@1797.44,1625
NetC32_2: C32.2 R33.1 R39.2 | length 409.2
  Top Layer w7: R39.2@1105,1525 1120,1510 1427.56,1510 R33.1@1435,1502.56 C32.2@1435,1572.44
NetC60_1: C60.1 R60.2 | length 73.5
  Top Layer w30: R60.2@3950,2397.44 4019.88,2397.44 C60.1@4022.44,2400
NetC61_1: C61.1 R61.2 | length 73.5
  Top Layer w30: R61.2@5265,2397.44 5334.88,2397.44 C61.1@5337.44,2400
NetD1_2: D1.2 IN.1 | length 1147.4
  Top Layer w17: IN.1@1300,3000 1390,3000 ccw(c1390,3374.2) 1654.6,3109.6 1818.55,3273.55 cw(c2172.11,2920) 2172.11,3420 D1.2@2311.01,3420
NetD1_7: D1.7 U1.1 | length 922.9
  Top Layer w17: D1.7@2398.41,3420 2870,3420 cw(c2870,3190) 3100,3190 U1.1@3100,3100
NetDP1_1: DP1.1 RL1.2 | length 69.9
  Top Layer w6: DP1.1@4275,1377.56 RL1.2@4275,1447.44
NetDP2_1: DP2.1 RL2.2 | length 69.9
  Top Layer w6: DP2.1@4350,1377.56 RL2.2@4350,1447.44
NetDP3_1: DP3.1 RL3.2 | length 69.9
  Top Layer w6: DP3.1@4425,1377.56 RL3.2@4425,1447.44
NetDP4_1: DP4.1 RL4.2 | length 69.9
  Top Layer w6: DP4.1@4500,1377.56 RL4.2@4500,1447.44
NetDP5_1: DP5.1 RL5.2 | length 69.9
  Top Layer w6: DP5.1@4575,1377.56 RL5.2@4575,1447.44
NetDP6_1: DP6.1 RL6.2 | length 69.9
  Top Layer w6: DP6.1@4650,1377.56 RL6.2@4650,1447.44
NetDP7_1: DP7.1 RL7.2 | length 69.9
  Top Layer w6: DP7.1@4725,1377.56 RL7.2@4725,1447.44
NetDP8_1: DP8.1 RL8.2 | length 69.9
  Top Layer w6: DP8.1@4800,1377.56 RL8.2@4800,1447.44
NetDP9_1: DP9.1 RL9.2 | length 69.9
  Top Layer w6: DP9.1@4930,1377.56 RL9.2@4930,1447.44
NetDP10_1: DP10.1 RL10.2 | length 69.9
  Top Layer w6: DP10.1@5005,1377.56 RL10.2@5005,1447.44
NetDP11_1: DP11.1 RL11.2 | length 69.9
  Top Layer w6: DP11.1@5120,1337.56 RL11.2@5120,1407.44
NetDP12_1: DP12.1 RL12.2 | length 69.9
  Top Layer w6: RL12.2@5345,1337.56 DP12.1@5345,1407.44
NetDP13_1: DP13.1 RL13.2 | length 69.9
  Top Layer w6: RL13.2@5270,1337.56 DP13.1@5270,1407.44
NetDP14_1: DP14.1 RL14.2 | length 69.9
  Top Layer w6: RL14.2@5195,1337.56 DP14.1@5195,1407.44
NetDP15_1: DP15.1 RL15.2 | length 69.9
  Top Layer w6: RL15.2@5420,1337.56 DP15.1@5420,1407.44
NetDP16_1: DP16.1 RL16.2 | length 69.9
  Top Layer w6: DP16.1@5495,1330.67 RL16.2@5495,1400.55
NetL1_1: L1.1 U3.3 | length 171
  Top Layer w17: U3.3@4154,2600 L1.1@4325,2600
NetL1_2: L1.2 LC20.1 | length 90
  Top Layer w17: L1.2@4425,2600.46 4515,2600
NetL2_1: L2.1 U4.3 | length 126
  Top Layer w17: U4.3@5484,2600 L2.1@5610,2600
NetL2_2: L2.2 OUT.1 | length 525
  Top Layer w17: L2.2@5725,2600 5968.7,2600.01 OUT.1@6250,2600
NetL3_2: L3.2 R60.1 | length 68.1
  Top Layer w30: R60.1@3950,2452.56 L3.2@3950,2520.63
NetL4_2: L4.2 R61.1 | length 68.1
  Top Layer w30: R61.1@5265,2452.56 L4.2@5265,2520.63
NetLC6_1: LC6.1 R7_ATTEN3.2 U10.14 | length 1472.9
  Top Layer w6: R7_ATTEN3.2@4804.02,2397.88 4804.02,2330.98 4985,2150 5200,2150 5225,2125 5225,1915 5210,1900 U10.14@5158.27,1900 ; 5225,2055 5430,2055 5575,2200 LC6.1@5781.69,2200
NetLC9_1: LC9.1 U1_ATTEN3.4 U10.11 | length 1901
  Top Layer w6: U1_ATTEN3.4@4881.36,2561.09 4859.66,2561.09 4849.02,2550.44 4849.02,2345.98 4995,2200 5200,2200 5260,2140 v2(5260,2099.85) ; U10.11@5158.27,1750 5225,1750 5260,1785 v2(5260,2015) 5455,2015 5565,2125 LC9.1@5906.69,2125
  Interconnects w6: v2(5260,2015) v2(5260,2099.85)
NetLC21_8: LC21.8 U1_ATTEN2.2 | length 376.7
  Top Layer w8: 3147.64,1527.24 U1_ATTEN2.2@3177.36,1527.24
  Top Layer w17: LC21.8@2850,1682.5 2921.29,1611.21 ccw(c3124,1813.92) 3124,1527.24 3145.02,1527.24
NetR1_2: R1.2 U1.4 | length 118.8
  Top Layer w17: R1.2@3302.56,2775 U1.4@3302.56,2893.82
NetR1_ATTEN1_1: R1_ATTEN1.1 U1_ATTEN1.17 | length 122.7
  Top Layer w8: U1_ATTEN1.17@3269.11,2202.97 3269.11,2247.46 R1_ATTEN1.1@3324.43,2302.77
NetR1_ATTEN2_1: R1_ATTEN2.1 U1_ATTEN2.17 | length 122.7
  Top Layer w8: U1_ATTEN2.17@3269.69,1580.2 3269.69,1624.69 R1_ATTEN2.1@3325,1680
NetR1_ATTEN3_1: R1_ATTEN3.1 U1_ATTEN3.17 | length 122.7
  Top Layer w8: U1_ATTEN3.17@4973.69,2653.41 4973.69,2697.9 R1_ATTEN3.1@5029,2753.21
NetR1_ATTEN4_1: R1_ATTEN4.1 U1_ATTEN4.17 | length 122.7
  Top Layer w8: U1_ATTEN4.17@2369.68,2397.64 2369.68,2442.13 R1_ATTEN4.1@2425,2497.44
NetR1_ATTEN5_1: R1_ATTEN5.1 U1_ATTEN5.17 | length 122.7
  Top Layer w8: U1_ATTEN5.17@2369.68,3122.64 2369.68,3167.13 R1_ATTEN5.1@2425,3222.44
NetR2_ATTEN1_1: R2_ATTEN1.1 U1_ATTEN1.15 | length 207.5
  Top Layer w8: U1_ATTEN1.15@3322.06,2169.7 3341.35,2169.7 R2_ATTEN1.1@3474.43,2302.77
NetR2_ATTEN2_1: R2_ATTEN2.1 U1_ATTEN2.15 | length 207.5
  Top Layer w8: U1_ATTEN2.15@3322.64,1546.93 3341.93,1546.93 R2_ATTEN2.1@3475,1680
NetR2_ATTEN3_1: R2_ATTEN3.1 U1_ATTEN3.15 | length 190.9
  Top Layer w8: U1_ATTEN3.15@5026.64,2620.14 5045.93,2620.14 5139,2713.21 R2_ATTEN3.1@5139,2753.21
NetR2_ATTEN4_1: R2_ATTEN4.1 U1_ATTEN4.15 | length 207.5
  Top Layer w8: U1_ATTEN4.15@2422.64,2364.37 2441.93,2364.37 R2_ATTEN4.1@2575,2497.44
NetR2_ATTEN5_1: R2_ATTEN5.1 U1_ATTEN5.15 | length 207.5
  Top Layer w8: U1_ATTEN5.15@2422.64,3089.37 2441.93,3089.37 R2_ATTEN5.1@2575,3222.44
NetR3_2: R3.2 R36.1 U9.5 | length 571.5
  Top Layer w7: U9.5@1585,1316.73 1585,1355 cw(c1650,1355) 1650,1420 ccw(c1650,1543.12) 1737.06,1456.06 1784,1503 cw(c1875.74,1411.26) 1839.22,1535.76 cw(c1875.74,1411.26) 1875.74,1541 1880,1541 ccw(c1880,1586) 1925,1586 R3.2@1925,1597.44
  Top Layer w15: R36.1@1852.56,1625 ccw(c1919.09,1691.53) 1919.09,1597.44 R3.2@1925,1597.44
NetR3_ATTEN1_1: R3_ATTEN1.1 U1_ATTEN1.16 | length 173.5
  Top Layer w8: U1_ATTEN1.16@3288.8,2202.97 3288.8,2239.7 3314.43,2265.33 3361.98,2265.33 R3_ATTEN1.1@3399.43,2302.77
NetR3_ATTEN2_1: R3_ATTEN2.1 U1_ATTEN2.16 | length 173.5
  Top Layer w8: U1_ATTEN2.16@3289.37,1580.2 3289.37,1616.93 3315,1642.56 3362.56,1642.56 R3_ATTEN2.1@3400,1680
NetR3_ATTEN3_1: R3_ATTEN3.1 U1_ATTEN3.16 | length 167.6
  Top Layer w8: U1_ATTEN3.16@4993.37,2653.41 4993.37,2690.14 5019,2715.77 5046.56,2715.77 R3_ATTEN3.1@5084,2753.21 ; R3_ATTEN3.1@5094,2743.21 5104,2753.21
NetR3_ATTEN4_1: R3_ATTEN4.1 U1_ATTEN4.16 | length 173.5
  Top Layer w8: U1_ATTEN4.16@2389.37,2397.64 2389.37,2434.37 2415,2460 2462.56,2460 R3_ATTEN4.1@2500,2497.44
NetR3_ATTEN5_1: R3_ATTEN5.1 U1_ATTEN5.16 | length 173.5
  Top Layer w8: U1_ATTEN5.16@2389.37,3122.64 2389.37,3159.37 2415,3185 2462.56,3185 R3_ATTEN5.1@2500,3222.44
NetR4_ATTEN1_1: R4_ATTEN1.1 U1_ATTEN1.1 | length 207.5
  Top Layer w8: R4_ATTEN1.1@3024.43,2302.77 3157.5,2169.7 U1_ATTEN1.1@3176.79,2169.7
NetR4_ATTEN2_1: R4_ATTEN2.1 U1_ATTEN2.1 | length 207.5
  Top Layer w8: R4_ATTEN2.1@3025,1680 3158.07,1546.93 U1_ATTEN2.1@3177.36,1546.93
NetR4_ATTEN3_1: R4_ATTEN3.1 U1_ATTEN3.1 | length 190.9
  Top Layer w8: R4_ATTEN3.1@4769,2753.21 4769,2713.21 4862.07,2620.14 U1_ATTEN3.1@4881.36,2620.14
NetR4_ATTEN4_1: R4_ATTEN4.1 U1_ATTEN4.1 | length 207.5
  Top Layer w8: R4_ATTEN4.1@2125,2497.44 2258.07,2364.37 U1_ATTEN4.1@2277.36,2364.37
NetR4_ATTEN5_1: R4_ATTEN5.1 U1_ATTEN5.1 | length 207.5
  Top Layer w8: R4_ATTEN5.1@2125,3222.44 2258.07,3089.37 U1_ATTEN5.1@2277.36,3089.37
NetR5_ATTEN1_1: R5_ATTEN1.1 U1_ATTEN1.19 | length 122.7
  Top Layer w8: R5_ATTEN1.1@3174.43,2302.77 3229.74,2247.46 U1_ATTEN1.19@3229.74,2202.97
NetR5_ATTEN2_1: R5_ATTEN2.1 U1_ATTEN2.19 | length 122.7
  Top Layer w8: R5_ATTEN2.1@3175,1680 3230.32,1624.68 U1_ATTEN2.19@3230.32,1580.2
NetR5_ATTEN3_1: R5_ATTEN3.1 U1_ATTEN3.19 | length 122.7
  Top Layer w8: R5_ATTEN3.1@4879,2753.21 4934.32,2697.9 U1_ATTEN3.19@4934.32,2653.41
NetR5_ATTEN4_1: R5_ATTEN4.1 U1_ATTEN4.19 | length 122.7
  Top Layer w8: R5_ATTEN4.1@2275,2497.44 2330.32,2442.13 U1_ATTEN4.19@2330.32,2397.64
NetR5_ATTEN5_1: R5_ATTEN5.1 U1_ATTEN5.19 | length 122.7
  Top Layer w8: R5_ATTEN5.1@2275,3222.44 2330.32,3167.13 U1_ATTEN5.19@2330.32,3122.64
NetR6_ATTEN1_1: R6_ATTEN1.1 U1_ATTEN1.20 | length 173.5
  Top Layer w8: R6_ATTEN1.1@3099.43,2302.77 3136.87,2265.33 3184.43,2265.33 3210.06,2239.7 U1_ATTEN1.20@3210.06,2202.97
NetR6_ATTEN2_1: R6_ATTEN2.1 U1_ATTEN2.20 | length 173.5
  Top Layer w8: R6_ATTEN2.1@3100,1680 3137.44,1642.56 3185,1642.56 3210.63,1616.93 U1_ATTEN2.20@3210.63,1580.2
NetR6_ATTEN3_1: R6_ATTEN3.1 U1_ATTEN3.20 | length 153.5
  Top Layer w8: R6_ATTEN3.1@4824,2753.21 4861.44,2715.77 4889,2715.77 4914.63,2690.14 U1_ATTEN3.20@4914.63,2653.41
NetR6_ATTEN4_1: R6_ATTEN4.1 U1_ATTEN4.20 | length 173.5
  Top Layer w8: R6_ATTEN4.1@2200,2497.44 2237.44,2460 2285,2460 2310.63,2434.37 U1_ATTEN4.20@2310.63,2397.64
NetR6_ATTEN5_1: R6_ATTEN5.1 U1_ATTEN5.20 | length 173.5
  Top Layer w8: R6_ATTEN5.1@2200,3222.44 2237.44,3185 2285,3185 2310.63,3159.37 U1_ATTEN5.20@2310.63,3122.64
NetR7_ATTEN1_1: R7_ATTEN1.1 U1_ATTEN1.3 | length 171.9
  Top Layer w6: R7_ATTEN1.1@3099.44,2002.56 3099.44,2052.98 cw(c3176.79,2052.98) 3108.22,2088.78 cw(c3176.79,2052.98) 3140.99,2121.55 cw(c3176.79,2052.98) U1_ATTEN1.3@3176.79,2130.33
NetR7_ATTEN2_1: R7_ATTEN2.1 U1_ATTEN2.3 | length 121.9
  Top Layer w6: R7_ATTEN2.1@3100.02,1429.79 3100.02,1430.21 cw(c3177.36,1430.21) 3108.8,1466.01 cw(c3177.36,1430.21) 3141.56,1498.78 cw(c3177.36,1430.21) U1_ATTEN2.3@3177.36,1507.56
NetR7_ATTEN3_1: R7_ATTEN3.1 U1_ATTEN3.3 | length 175.6
  Top Layer w6: R7_ATTEN3.1@4804.02,2453 4804.02,2530.44 4854.35,2580.77 U1_ATTEN3.3@4881.36,2580.77
NetR7_ATTEN4_1: R7_ATTEN4.1 U1_ATTEN4.3 | length 175.6
  Top Layer w6: R7_ATTEN4.1@2200.02,2197.23 2200.02,2274.67 2250.35,2325 U1_ATTEN4.3@2277.36,2325
NetR7_ATTEN5_1: R7_ATTEN5.1 U1_ATTEN5.3 | length 175.6
  Top Layer w6: R7_ATTEN5.1@2200.02,2922.23 2200.02,2999.67 2250.35,3050 U1_ATTEN5.3@2277.36,3050
NetR20_1: R20.1 U2.4 | length 130.9
  Top Layer w7: R20.1@3577.56,2675 3591.72,2675 cw(c3591.72,2606.72) 3640,2655 ccw(c3682.49,2697.49) 3682.49,2637.4 U2.4@3698.43,2637.4
NetR21_1: R21.1 U2.5 | length 1446
  Top Layer w7: v2(3600,2620) 3604.25,2615.75 U2.5@3687.6,2615.75 ; R21.1@4635,2002.56 v2(4635,2090)
  Interconnects w7: v2(3600,2620) 3630,2590 3630,2565 3955,2240 4485,2240 v2(4635,2090)
NetR22_1: R22.1 U2.6 | length 1428
  Top Layer w7: v2(3575,2585) 3600,2585 3615,2600 U2.6@3687.6,2600 ; R22.1@4580,2002.56 v2(4580,2050)
  Interconnects w7: v2(3575,2585) 3945,2215 4475,2215 4580,2110 v2(4580,2050)
NetR23_1: R23.1 U2.7 | length 1404.8
  Top Layer w7: v2(3550,2550) 3600,2550 3634.25,2584.25 U2.7@3687.6,2584.25 ; R23.1@4525,2002.56 v2(4525,2090)
  Interconnects w7: v2(3550,2550) 3910,2190 4425,2190 v2(4525,2090)
NetR24_2: R24.2 U8.7 | length 2925.1
  Top Layer w7: U8.7@1809.42,2630.32 1809.73,2630 1965,2630 1975,2640 3360,2640 v2(3420,2580) ; R24.2@4415,2002.56 v2(4415,2090)
  Interconnects w7: v2(3420,2580) 3850,2150 4355,2150 v2(4415,2090)
NetR25_2: R25.2 U8.8 | length 3000
  Top Layer w7: U8.8@1809.42,2650 1950,2650 1960,2660 3400,2660 v2(3445,2615) ; R25.2@4470,2002.56 v2(4470,2050)
  Interconnects w7: v2(3445,2615) 3890,2170 4410,2170 4470,2110 v2(4470,2050)
NetR31_1: R31.1 U8.9 | length 115.6
  Top Layer w6: U8.9@1809.42,2669.69 1882.13,2669.69 R31.1@1912.44,2700
NetR33_2: R33.2 R34.1 U9.3 | length 256
  Top Layer w7: R33.2@1435,1452.56 1577.44,1452.56 ccw(c1577.44,1510.12) 1635,1510.12 U9.3@1635,1533.27
NetR34_2: R34.2 U9.6 U9.7 | length 421.5
  Top Layer w7: R34.2@1510,1397.44 1510,1320 ccw(c1585,1320) 1585,1245 1635,1245 ; U9.6@1635,1316.73 1635,1245 ; U9.7@1685,1316.73 1685,1285 cw(c1645,1285) 1645,1245 1635,1245
NetR35_1: R35.1 R39.1 | length 365.8
  Top Layer w10: R39.1@1295,1425 cw(c1295,1330.85) 1361.58,1397.42 1417.55,1341.45 cw(c1226.1,1150) R35.1@1496.85,1150
NetRL6_1: RL6.1 U10.5 | length 446.8
  Top Layer w7: RL6.1@4650,1502.56 4651.97,1502.56 4845,1695.59 4845,1750 4875,1780 4905,1780 4925,1800 U10.5@4941.73,1800
NetT2-A_1: T2-A.1 T2-B.1 | length 19026.5
  Top Layer w17: T2-A.1@1300,4995 1495,4995 ccw(c1495,5375) 1875,5375 cw(c2300,5375) 2300,5800 5100,5800 cw(c5100,5600) 5300,5600 cw(c5100,5600) 5228.37,5446.63 cw(c5100,5600) 5100,5400 2450,5400 ccw(c2450,5200) 2250,5200 ccw(c2450,5200) 2450,5000 5100,5000 cw(c5100,4800) 5300,4800 cw(c5100,4800) 5100,4600 2400,4600 ccw(c2400,4400) 2293.28,4569.15 ccw(c2400,4400) 2200,4400 ccw(c2400,4400) 2400,4200 5200,4200 ccw(c5200,4625) 5625,4625 cw(c5995,4625) 5995,4995 T2-B.1@6200,4995
SR_LATCH: LC5.1 RL11.1 U10.12 | length 1194.9
  Top Layer w7: RL11.1@5120,1462.56 5121.97,1462.56 5280,1620.59 v2(5280,1680) ; U10.12@5158.27,1800 v2(5220.71,1800) ; v2(5300,1879.29) 5300,1945 5340,1985 5480,1985 5545,2050 LC5.1@5781.69,2050
  Interconnects w7: v2(5280,1680) 5280,1740.71 v2(5220.71,1800) v2(5300,1879.29)
SW_1: CONT.11 LC5.3 | length 528.1
  Top Layer w7: LC5.3@5868.31,2050 5975,2050 6025,2000 6025,1765 6075,1715 v2(6075,1670)
  other v2: 6075,1538
U2_S1: C23.2 R23.2 RL3.1 U10.2 | length 1184.3
  Top Layer w7: RL3.1@4425,1502.56 4512.44,1590 4620,1590 4760,1730 4760,1840 4790,1870 v2(4815,1870) 4860,1870 4879.95,1889.95 4879.95,1924.95 4905,1950 U10.2@4941.73,1950 ; C23.2@4525,1852.56 v2(4525,1900) R23.2@4525,1947.44
  Interconnects w7: v2(4525,1900) 4555,1870 v2(4815,1870)
U2_S2: C22.2 R22.2 RL2.1 U10.1 | length 1248.5
  Top Layer w7: RL2.1@4350,1502.56 4467.44,1620 4610,1620 4735,1745 4735,1850 4785,1900 v2(4845,1900) 4845,1950 4895,2000 U10.1@4941.73,2000 ; C22.2@4580,1852.56 v2(4580,1900) R22.2@4580,1947.44
  Interconnects w7: v2(4580,1900) v2(4845,1900)
U2_S3: C21.2 R21.2 RL1.1 U10.15 | length 1451.8
  Top Layer w7: RL1.1@4275,1502.56 4417.44,1645 4595,1645 4700,1750 4700,1882.44 R21.2@4635,1947.44 ; C21.2@4635,1852.56 R21.2@4635,1947.44 ; U10.15@5158.27,1950 5100,1950 5002.56,2047.44 4907.44,2047.44 4807.44,1947.44 R21.2@4635,1947.44
U8_S2: C25.2 R25.1 RL4.1 U10.3 | length 1165.5
  Top Layer w7: C25.2@4470,1852.56 v2(4470,1900) R25.1@4470,1947.44 ; RL4.1@4500,1502.56 4562.44,1565 4635,1565 4785,1715 4785,1825 4800,1840 v2(4845,1840) 4860,1840 4920,1900 U10.3@4941.73,1900
  Interconnects w7: v2(4470,1900) 4530,1840 v2(4845,1840)
U8_S3: C24.2 R24.1 RL5.1 U10.4 | length 1087.6
  Top Layer w7: C24.2@4415,1852.56 v2(4415,1900) R24.1@4415,1947.44 ; RL5.1@4575,1502.56 4612.44,1540 4650,1540 4815,1705 v2(4815,1810) 4885,1810 U10.4@4925,1850
  Interconnects w7: v2(4415,1900) 4505,1810 v2(4815,1810)
pads on no net: L1.4 L2.4 N1.1 U1.5 U1_ATTEN1.0 U1_ATTEN1.7 U1_ATTEN1.8 U1_ATTEN2.0 U1_ATTEN2.7 U1_ATTEN2.8 U1_ATTEN3.0 U1_ATTEN3.7 U1_ATTEN3.8 U1_ATTEN4.0 U1_ATTEN4.7 U1_ATTEN4.8 U1_ATTEN5.0 U1_ATTEN5.7 U1_ATTEN5.8 U2.8 U2.12 U2.14 U10.9

## Polygon pours and split planes (outlines as drawn)
no net on Top Solder "Bottom Layer-No Net" (solid): 2095,1495 2035,1495 2035,1325 2115,1325 2115,1495
no net on Top Solder "Bottom Layer-No Net" (solid): 2185,2275 2240,2330 2240,2365 2180,2425 2000,2425 1870,2555 1675,2555 1675,2450 1850,2275
no net on Top Solder "Bottom Layer-No Net" (solid): 1370,3420 1370,3360 1720,3360 1720,3440 1370,3440
no net on Top Solder "Bottom Layer-No Net" (solid): 1370,2571.62 1370,2505 1550,2505 1550,2593.82 1370,2593.82
no net on Top Solder "Bottom Layer-No Net" (solid): 1370,3020 1370,2960 1590,2960 1590,3040 1370,3040
GND on Top Layer "Bottom Layer-No Net" (solid, pour order 38): 2190,1700 2080,1700 2080,1550 2190,1550
GND on Top Layer "Bottom Layer-No Net" (solid, pour order 35): 1835.44,1517.45 1835.44,1407.45 1985.44,1407.45 1985.44,1517.45
GND on Top Layer "Bottom Layer-No Net" (solid, pour order 43): 2345,2391.3 2355,2391.3 2355,2456.3 2385,2486.3 2385,2592.44 2315,2592.44 2315,2486.3 2345,2456.3
GND on Top Layer "Bottom Layer-No Net" (solid, pour order 42): 2345,3116.3 2355,3116.3 2355,3181.3 2385,3211.3 2385,3317.44 2315,3317.44 2315,3211.3 2345,3181.3
GND on Top Layer "Bottom Layer-No Net" (solid, pour order 41): 3244.43,2196.63 3254.43,2196.63 3254.43,2261.63 3284.43,2291.63 3284.43,2397.77 3214.43,2397.77 3214.43,2291.63 3244.43,2261.63
GND on Top Layer "Bottom Layer-No Net" (solid, pour order 40): 4949,2647.07 4959,2647.07 4959,2712.07 4989,2742.07 4989,2848.21 4919,2848.21 4919,2742.07 4949,2712.07
GND on Top Layer "Bottom Layer-No Net" (solid, pour order 39): 3245,1573.86 3255,1573.86 3255,1638.86 3285,1668.86 3285,1775 3215,1775 3215,1668.86 3245,1638.86
GND on Top Layer "Bottom Layer-No Net" (solid, pour order 34): 2497.46,2252.54 2440,2310 2410,2310 2410,2265 2390,2265 2390,2100 2497.46,2100
GND on Top Layer "Bottom Layer-No Net" (solid, pour order 33): 2498.73,2976.27 2441.27,3033.73 2411.27,3033.73 2411.27,2988.73 2391.27,2988.73 2391.27,2823.73 2498.73,2823.73
GND on Top Layer "Bottom Layer-No Net" (solid, pour order 31): 5101.46,2508.32 5044,2565.77 5014,2565.77 5014,2520.77 4994,2520.77 4994,2355.77 5101.46,2355.77
GND on Top Layer "Bottom Layer-No Net" (solid, pour order 30): 3397.46,1435.1 3340,1492.56 3310,1492.56 3310,1447.56 3290,1447.56 3290,1282.56 3397.46,1282.56
GND on Top Layer "Bottom Layer-No Net" (solid, pour order 28): 1690,2565 1690,2735 1845,2735 1860,2735 1860,2670 1860,2565 1690,2565
GND on Gnd 1 "Bottom Layer-No Net" (solid, shelved, pour order 46): 1050,1050 6450,1050 6450,5950 1050,5950 1050,1050
3V3 on Interconnects "Bottom Layer-No Net" (solid, shelved, pour order 45): 1050,1050 6450,1050 6450,3950 1050,3950 1050,1050
GND on Gnd 2 "Bottom Layer-No Net" (solid, shelved, pour order 44): 1050,1050 1050,3950 6450,3950 6450,1050 1050,1050
GND on Top Layer "Bottom Layer-No Net" (solid, shelved, pour order 32): 3396.88,2057.87 3339.43,2115.33 3309.43,2115.33 3309.43,2070.33 3289.43,2070.33 3289.43,1905.33 3396.88,1905.33
no net on Bottom Solder "Bottom Layer-No Net" (solid, shelved): 6500,1000 1000,1000 1000,4000 6500,4000 6500,1000
no net on Top Solder "Bottom Layer-No Net" (solid, shelved): 3815,2660 4025,2870 4025,3140 3960,3140 3450,3650 1750,3650 1625,3525 1625,3175 1490,3040 1490,2960 1635,2960 2000,3325 2090,3325 2090,3175 1990,3175 1675,2860 1675,2725 1575,2725 1500,2650 1500,2450 1675,2450 1675,2745 1860,2745 1900,2785 1900,2850 2045,2995 2220,2995 2275,3050 2275,3100 2200,3175 2090,3175 2090,3325 2075,3325 2125,3375 2575,3375 2610,3340 2610,3190 2565,3145 2520,3145 2475,3100 2475,3045 2520,3000 2675,3000 2850,2825 3500,2825 3665,2660
no net on Top Solder "Bottom Layer-No Net" (solid, shelved): 3705,2515 2815,2515 2725,2425 2520,2425 2465,2370 2465,2320 2510,2275 2775,2275 2920,2420 3705,2420
no net on Top Solder "Bottom Layer-No Net" (solid, shelved): 3085,2225 2975,2225 2800,2050 2625,2050 2535,1960 1675,1960 1675,1880 2805,1880 2975,2050 3055,2050 3135,2130 3135,2175
no net on Top Solder "Bottom Layer-No Net" (solid, shelved): 3930,2330 3930,2650 6425,2650 6425,2330
no net on Top Solder "Bottom Layer-No Net" (solid, shelved): 6500,6000 6500,4050 5950,4050 1000,4050 1000,6000
no net on Top Solder "Bottom Layer-No Net" (solid, shelved): 1370,1940 1370,1880 1985,1880 1985,1960 1370,1960
no net on Top Solder "Bottom Layer-No Net" (solid, shelved): 3905,2645 3905,2105 3875,2075 3875,1625 3715,1465 3400,1465 3365,1500 3365,1550 3455,1640 3565,1640 3725,1800 3725,2025 3675,2075 3415,2075 3370,2120 3370,2175 3465,2270 3515,2270 3550,2305 3550,2425 3662.01,2537.01 3775,2537.01 3790,2552.01 3790,2645

## Other copper
Top Layer:
  rectangle net 3V3: 4035,1854.88 4165,1914.88
  region net GND: 4165,1545.12 4035,1545.12 4035,1485.12 4165,1485.12
  rectangle net GND: 5345,2640 5505,2815
  rectangle net GND: 4015,2640 4175,2815
  region net GND: 3875,3225 3875,3150 3975,3150 3975,3225
  rectangle net GND: 2940,2960 3090,3040
  rectangle net GND: 3175,2725 3250,2825
  rectangle net GND: 2254.71,3347.99 2454.71,3394.99
  rectangle net GND: 2254.71,3437.99 2454.71,3514.99
  rectangle net 3V3: 5660,2730 5735,2825
  rectangle net 3V3: 4360,2730 4435,2825
  rectangle net GND: 4335,2880 4460,2940
  rectangle net GND: 5635,2880 5760,2940
  pour cut-out: 1816.11,2680.8 1780,2680.8 1780,2619.29 1816.57,2619.29
  pour cut-out: 1798.49,2537 1798.49,2595.51 1789,2605 1789,2630.24 1757,2630.24 1757,2605 1747.51,2595.51 1747.51,2537
  pour cut-out: 1747.51,2763 1747.51,2704.49 1757,2695 1757,2669.76 1789,2669.76 1789,2695 1798.49,2704.49 1798.49,2763
  pour cut-out: 1660,2624.51 1718.51,2624.51 1728,2634 1753.24,2634 1753.24,2666 1728,2666 1718.51,2675.49 1660,2675.49

## Silkscreen, mask and mechanical layers (free items; w line width, h text height)
Top Overlay:
  lines w10: 1000,4000 6500,4000 ; 1000,4050 6500,4050 ; 1000,1000 1000,6000 6500,6000 6500,1000 1000,1000
  text "Impedance Characterization Test line" at 2660,4360 h60
  text "EORE Integrated system - R2" at 2530,3770 h70
  text "R3" at 5940,3280 h60
  text "SVN:" at 5935,3195 h60
  text ".VersionControl_RevNumber" at 6155,3195 h60
  text ".Print_Date" at 5935,3110 h60
  text "15V" at 5025,1145 h45 r90
  text "3.3V" at 4955,1100 h45 r90
  text "SQ2 P1" at 4450,1030 h45 r90
  text "SQ8 P1" at 4520,1030 h45 r90
  text "SQ2 P3" at 4295,1025 h45 r90
  text "SQ2 P2" at 4370,1025 h45 r90
  text "SQ8 P2" at 4595,1025 h45 r90
  text "SQ8 P3" at 4670,1025 h45 r90
  text "DBG 1" at 4745,1025 h45 r90
  text "DBG 2" at 4820,1025 h45 r90
  text "SR CS" at 5140,1020 h45 r90
  text "AT1CS" at 5215,1020 h45 r90
  text "AT2CS" at 5295,1020 h45 r90
  text "AT4CS" at 5370,1020 h45 r90
  text "AT5CS" at 5445,1020 h45 r90
  text "AT3CS" at 5510,1020 h45 r90
Top Paste:
  lines w10: 1000,1000 1000,4000 6500,4000 6500,1000 1000,1000
Top Solder:
  drawing of 35 lines, arcs and shapes, not listed
Bottom Solder:
  drawing of 133 lines, arcs and shapes, not listed
Mechanical 15:
  lines w8: 1060,1060 1200,1200 ; 1060,1340 1200,1200 ; 1060,3660 1200,3800 ; 1060,3940 1200,3800 ; 1340,1060 1200,1200 ; 1340,1340 1200,1200 ; 1340,3660 1200,3800 ; 1340,3940 1200,3800 ; 2560,3660 2700,3800 ; 2560,3940 2700,3800 ; 2840,3660 2700,3800 ; 2840,3940 2700,3800 ; 6160,1060 6300,1200 ; 6160,1340 6300,1200 ; 6160,3660 6300,3800 ; 6160,3940 6300,3800 ; 6440,1060 6300,1200 ; 6440,1340 6300,1200 ; 6440,3660 6300,3800 ; 6440,3940 6300,3800